# EAGLE board esp8266_board (EAGLE 9.3.1)
REV: C
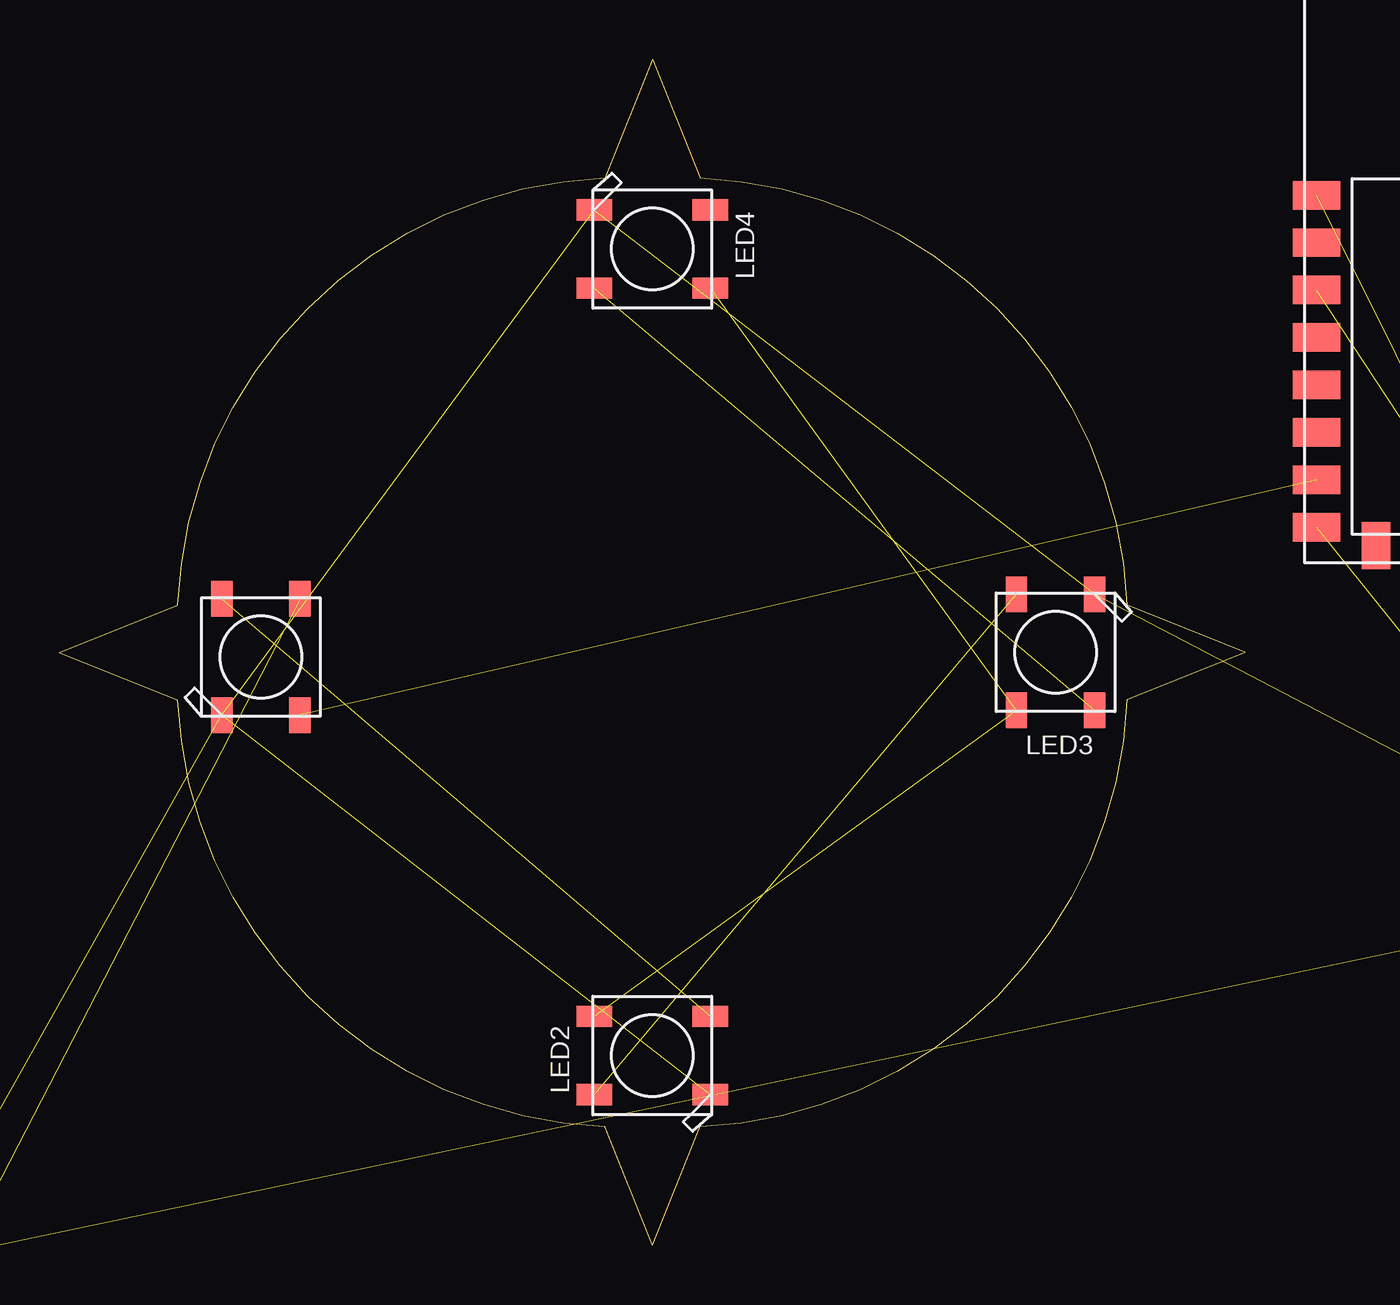
[diagram p0: board, top side]
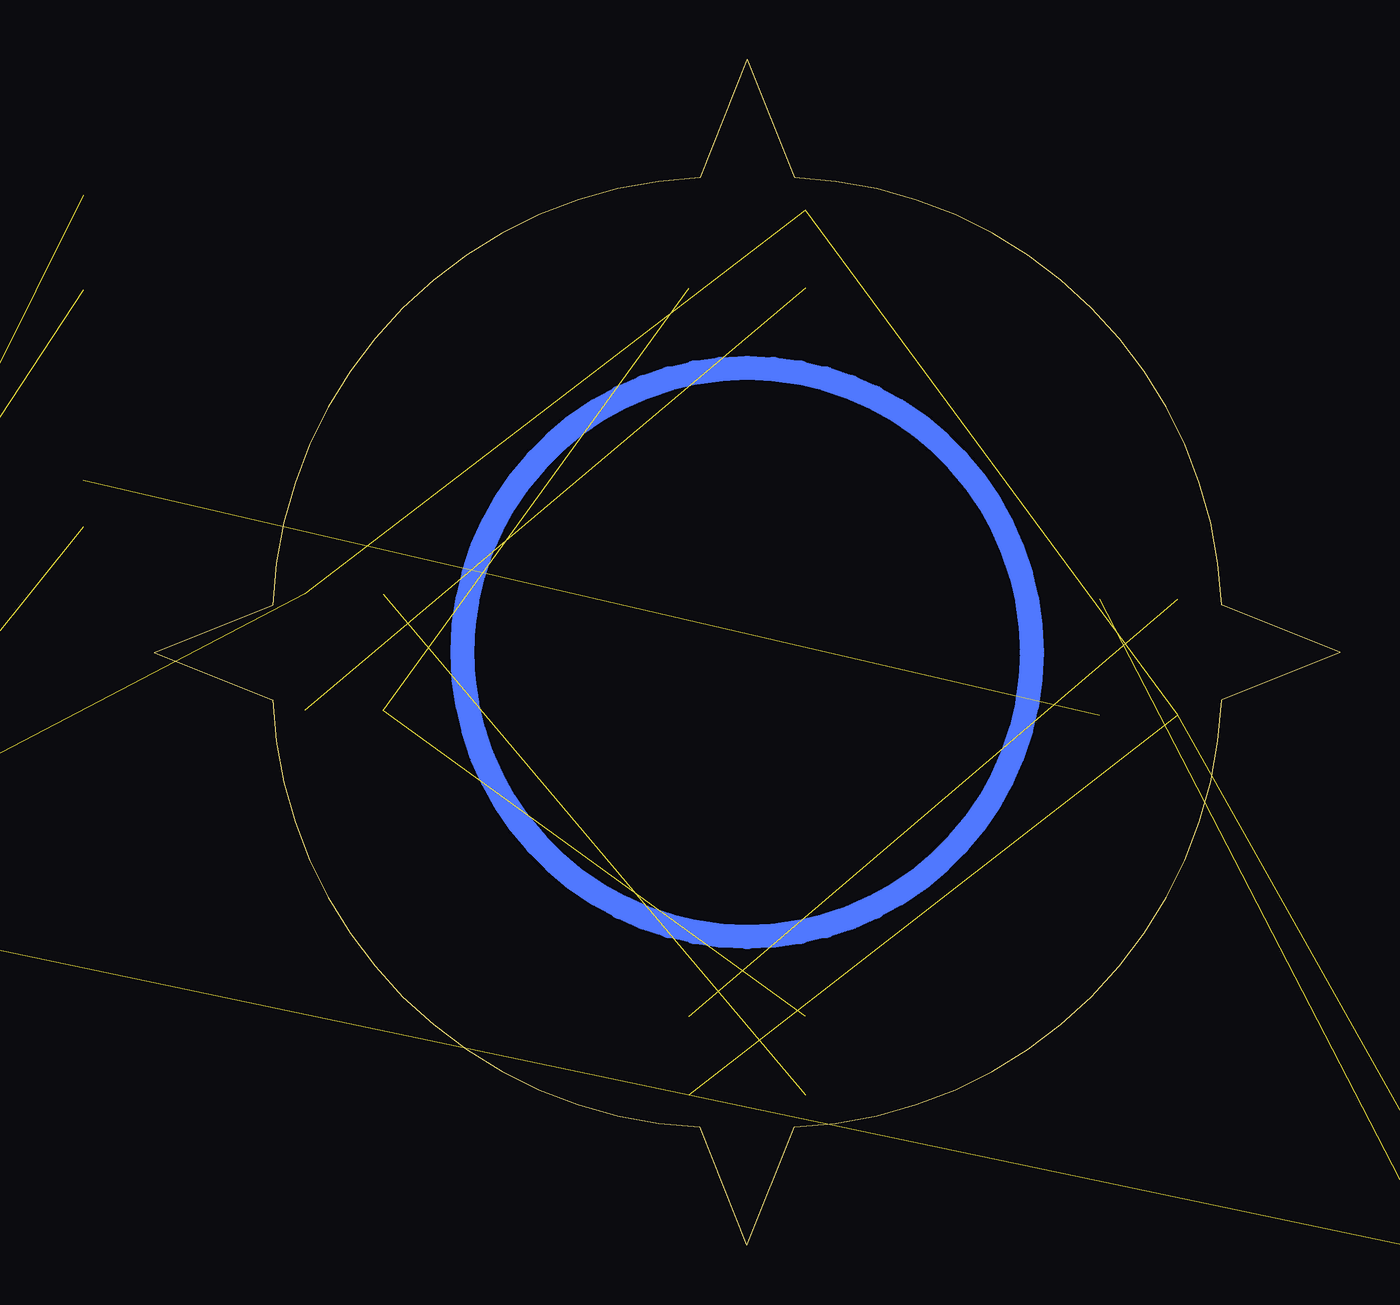
[diagram p1: board, bottom side, seen from below]

Size 50 x 50 mm. Coordinates in mm from the lower left corner, seen from the top.
Outline: 25,50 27,45 arc-85 45,27 50,25 45,23 arc-85 27,5 25,0 23,5 arc-85 5,23 0,25 5,27 arc-85 23,45 25,50
Copper layers (1*16): Top 0.035mm / dielectric 1.5mm / Bottom 0.035mm
Design rules "default": minimum track width 16mil, minimum drill 0.8mm, track to track 0.8mm, track to pad 0.8mm, pad to pad 0.8mm, via to via 0.8mm, smd to smd 0mil, copper to edge 1mil, drill to drill 1mil, minimum pad ring 10mil, minimum via ring 10mil, stop-mask expansion 1mil, vias tented up to drill 30mil, thermal gap 10mil

## Footprints (pad centres in the part's own frame; a part is rotated, then mirrored left to right if it is on the bottom)
0603-CAP = smd 1 x 1: 1 -0.9,0; 2 0.9,0
SK6812 = smd 1.5 x 0.9: 1-VDD 2.45,-1.65; 2-DOUT 2.45,1.65; 3-GND -2.45,1.65; 4-DIN -2.45,-1.65
0603-RES = smd 1 x 1: 1 -0.95,0; 2 0.95,0
LGA14 = smd 0.5 x 1.2: 1 2,1.1; 2 1.2,1.1; 3 0.4,1.1; 4 -0.4,1.1; 5 -1.2,1.1; 6 -2,1.1; 8 -2,-1.1; 9 -1.2,-1.1; 10 -0.4,-1.1; 11 0.4,-1.1; 12 1.2,-1.1; 13 2,-1.1 | smd 1.2 x 0.5: 7 -2.1,0; 14 2.1,0
SOT23-5 = smd 0.55 x 1.2: 1 -0.95,-1.3; 2 0,-1.3; 3 0.95,-1.3; 4 0.95,1.3; 5 -0.95,1.3
TESTPOINT-2 = smd 1.524 x 1.524: 1 0,0; 2 2.54,0
ESP-12E = smd 2 x 1.2: 1 -7.5,5.77; 2 -7.5,3.77; 3 -7.5,1.77; 4 -7.5,-0.23; 5 -7.5,-2.23; 6 -7.5,-4.23; 7 -7.5,-6.23; 8 -7.5,-8.23; 9 7.5,-8.23; 10 7.5,-6.23; 11 7.5,-4.23; 12 7.5,-2.23; 13 7.5,-0.23; 14 7.5,1.77; 15 7.5,3.77; 16 7.5,5.77 | smd 1.2 x 2: 17 -5,-9; 18 -3,-9; 19 -1,-9; 20 1,-9; 21 3,-9; 22 5,-9

## Placement (x,y rotation side)
C1  0.1uF  [0603-CAP]  -5,-0.3 180 top  (outside the outline)
C2  10uF  [0603-CAP]  76.8,19.5 270 top  (outside the outline)
C5  4.7µF  [0603-CAP]  73.5,15.6 90 top  (outside the outline)
C6  0.22µF  [0603-CAP]  68.1,19 0 top  (outside the outline)
C7  4.7uF  [0603-CAP]  64.2,15.2 180 top  (outside the outline)
C8  0.1uF  [0603-CAP]  64.2,17.2 180 top  (outside the outline)
LED1  NEOPIXEL_SK6812  [SK6812]  8.5,24.8 90 top
LED2  NEOPIXEL_SK6812  [SK6812]  25,8 180 top
LED3  NEOPIXEL_SK6812  [SK6812]  42,25 270 top
LED4  NEOPIXEL_SK6812  [SK6812]  25,42 0 top
R1  10K  [0603-RES]  64,24.1 180 top  (outside the outline)
R2  10K  [0603-RES]  75.33,15.53 90 top  (outside the outline)
R3  10K  [0603-RES]  64.41,21.44 180 top  (outside the outline)
R4  4.7K  [0603-RES]  78.76,15.2 90 top  (outside the outline)
U1  LSM303DLHC  [LGA14]  69.4,15.8 180 top  (outside the outline)
U$1  REGULATOR3.3V-0.5A-MIC5219  [SOT23-5]  76.4,23 90 top  (outside the outline)
U$2  HEADER-2-TESTPOINT  [TESTPOINT-2]  79,17.9 90 top  (outside the outline)
X2  ESP-12E  [ESP-12E]  60.5,38.5 0 top

## Library data of the parts
C1 C2 C5-C8 LED1-LED4 R1-R4 U$1 U$2 X2 = homemade-hardware
U1 = microbuilder

## Nets
GND: C1.2 C2.2 C5.2 C7.2 C8.2 LED1.3-GND LED2.3-GND LED3.3-GND LED4.3-GND R4.1 U1.7 U1.10 U1.11 U$1.2 U$2.1 X2.9
GPIO0: X2.12
N$1: R4.2 X2.10
N$2: R3.1 X2.3
N$3: C5.1 U1.6
N$4: C6.2 U1.12
N$5: C6.1 U1.13
N$6: R2.1 X2.11
N$8: LED1.2-DOUT LED2.4-DIN
N$9: LED2.2-DOUT LED3.4-DIN
N$10: LED3.2-DOUT LED4.4-DIN
NEOPIXEL: LED1.4-DIN X2.7
RESET: R1.2 X2.1
RXD: X2.15
SCL: U1.2 X2.14
SDA: U1.3 X2.13
TXD: X2.16
VCC: C1.1 C7.1 C8.1 LED1.1-VDD R1.1 R2.2 R3.2 U1.1 U1.14 U$1.5 X2.8
VDD: LED2.1-VDD LED3.1-VDD LED4.1-VDD
VIN: C2.1 U$1.1 U$1.3 U$2.2

## Tracks (layer width: path | path; a pad name or v marks a point on that pad's centre or on a via)
GND  (15 unrouted)
N$1  (1 unrouted)
N$2  (1 unrouted)
N$3  (1 unrouted)
N$4  (1 unrouted)
N$5  (1 unrouted)
N$6  (1 unrouted)
N$7
  Bottom 1.016: 25,13 arc90 37,25 arc90 25,37 arc90 13,25 arc90 25,13
N$8  (1 unrouted)
N$9  (1 unrouted)
N$10  (1 unrouted)
NEOPIXEL  (1 unrouted)
RESET  (1 unrouted)
SCL  (1 unrouted)
SDA  (1 unrouted)
VCC  (10 unrouted)
VDD  (2 unrouted)
VIN  (3 unrouted)